# Altium PCB PCB2.PcbDoc (part 1 of 2)
Units mil, origin at the board's own origin, x right, y up, seen from the top; angles counter-clockwise.
Board outline 2244.09 x 1732.28 mil, 4 copper layers (Top Layer, GND, PWR, Bottom Layer), stack 61.58 mil thick; 44 components, 99 nets, 307 pads, 123 vias.
Unrouted connection lines stored in the file: 48.
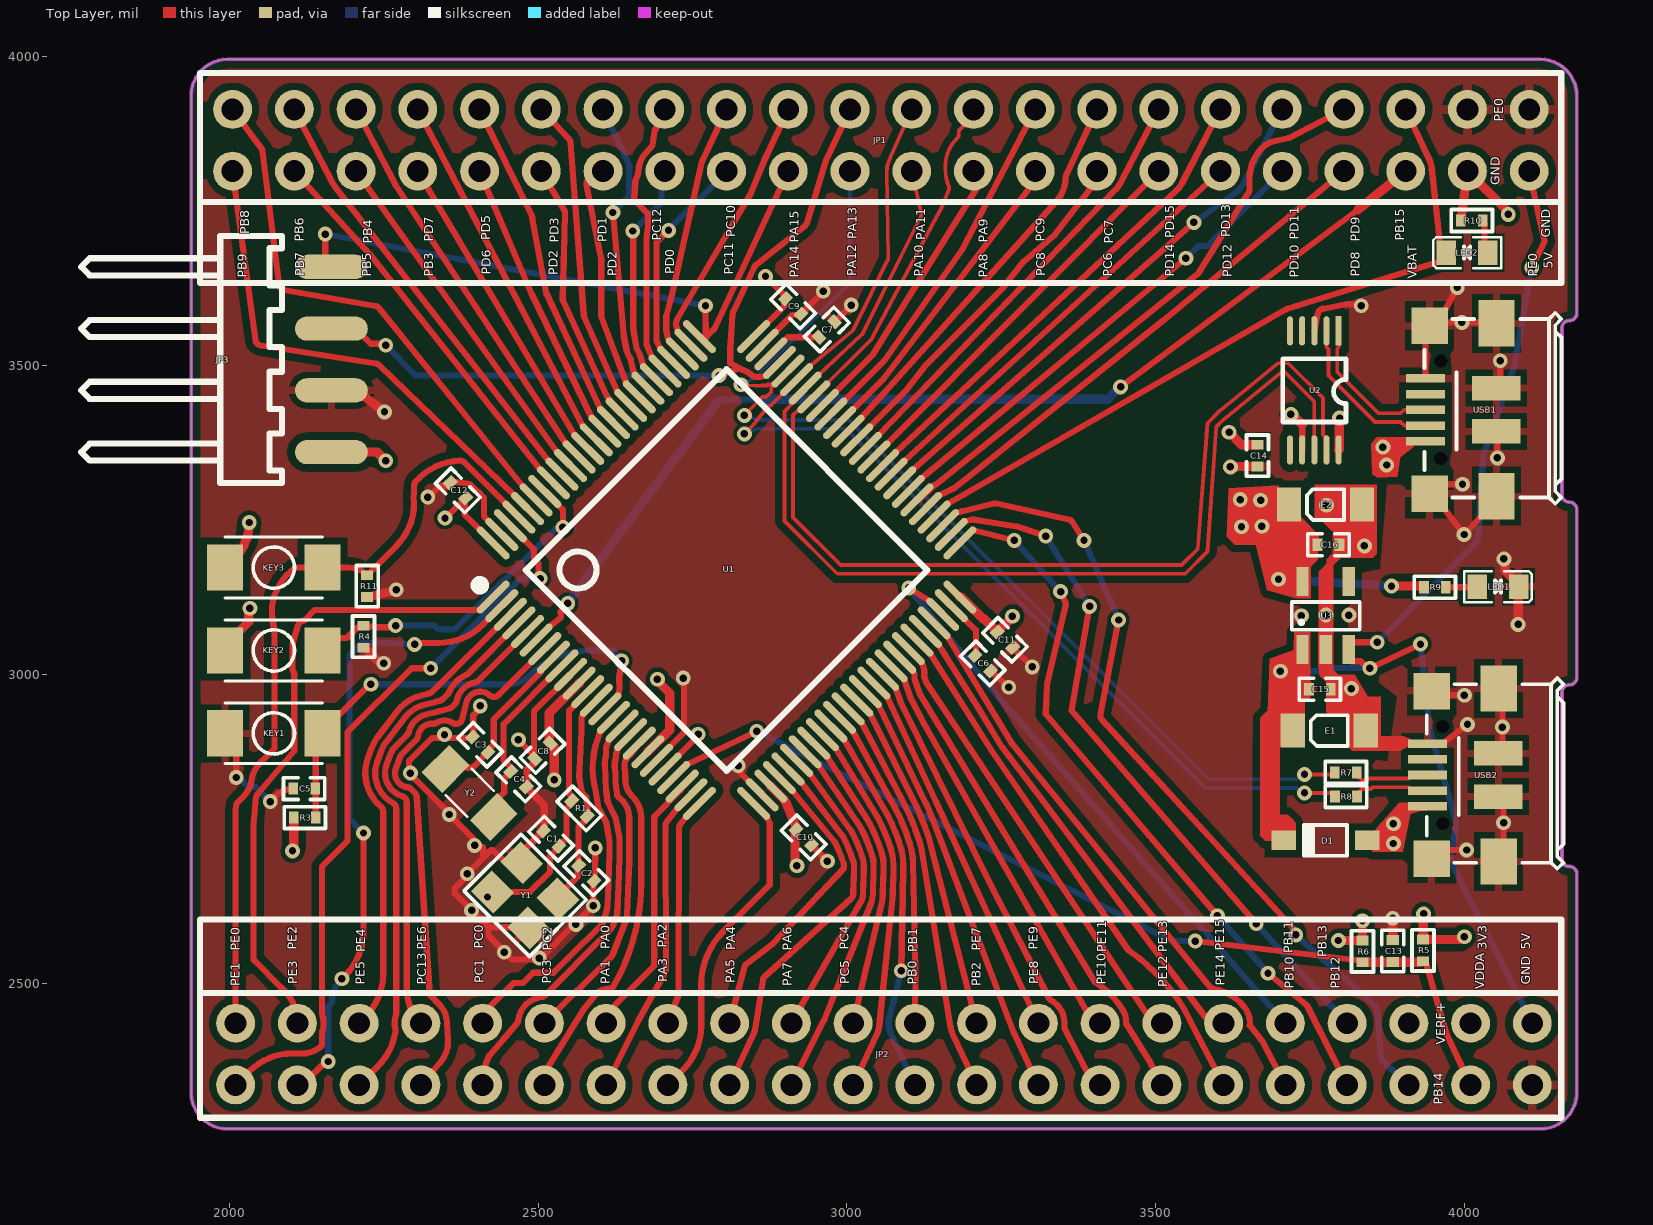
[diagram p0: Top Layer view]
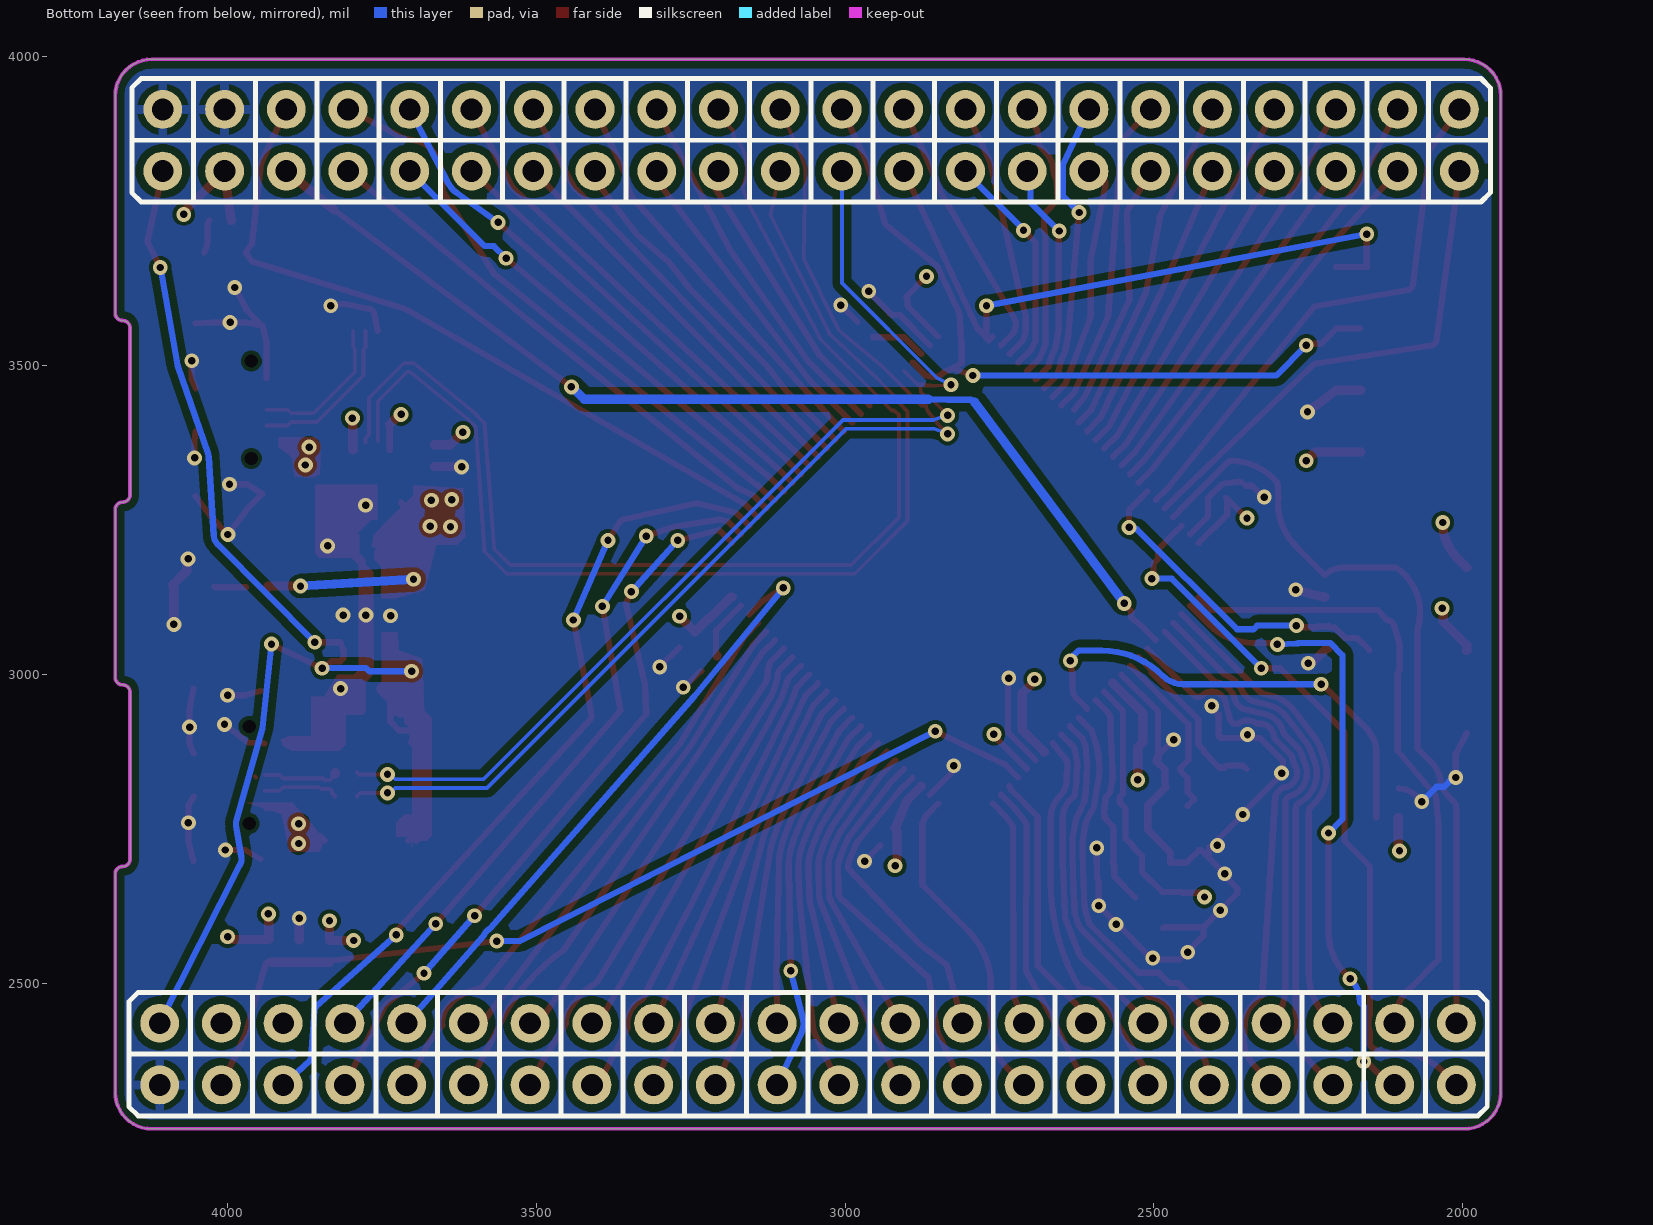
[diagram p1: Bottom Layer view, seen from below]
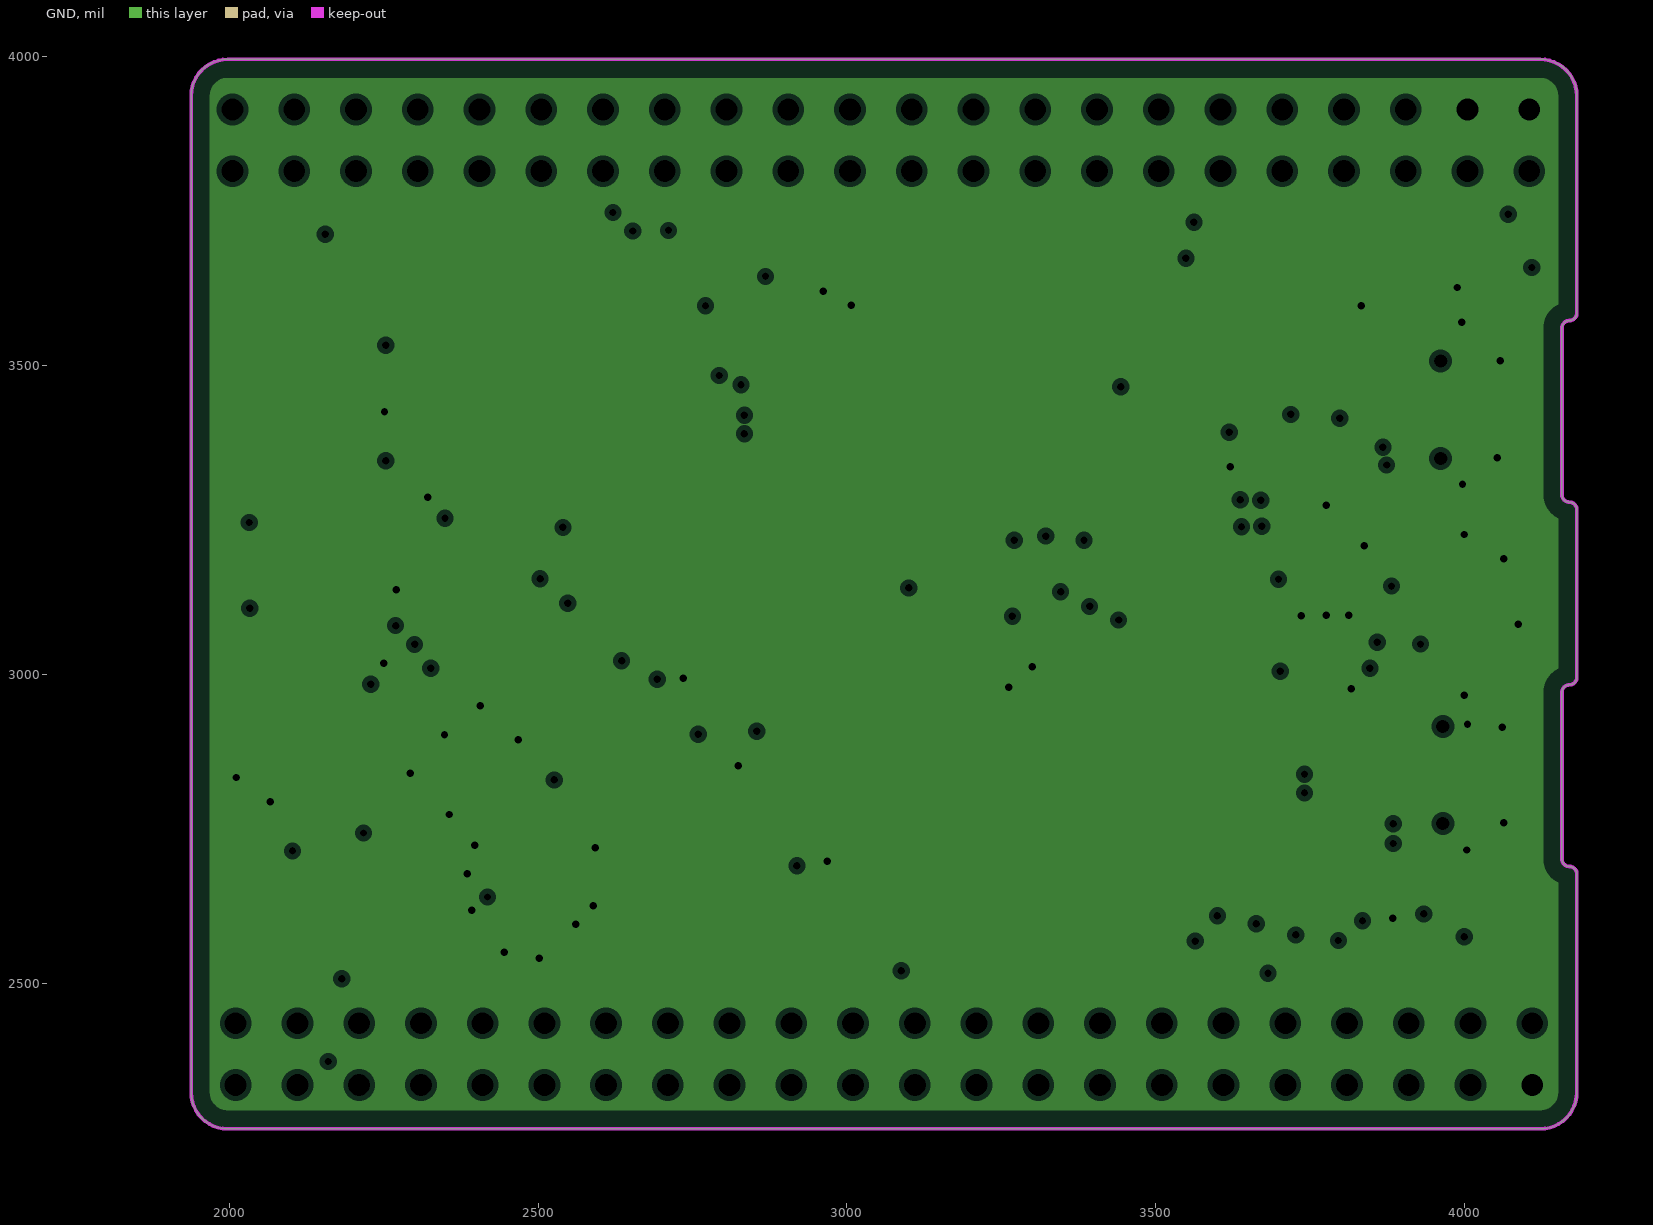
[diagram p2: GND, clearances drawn from the general rule]
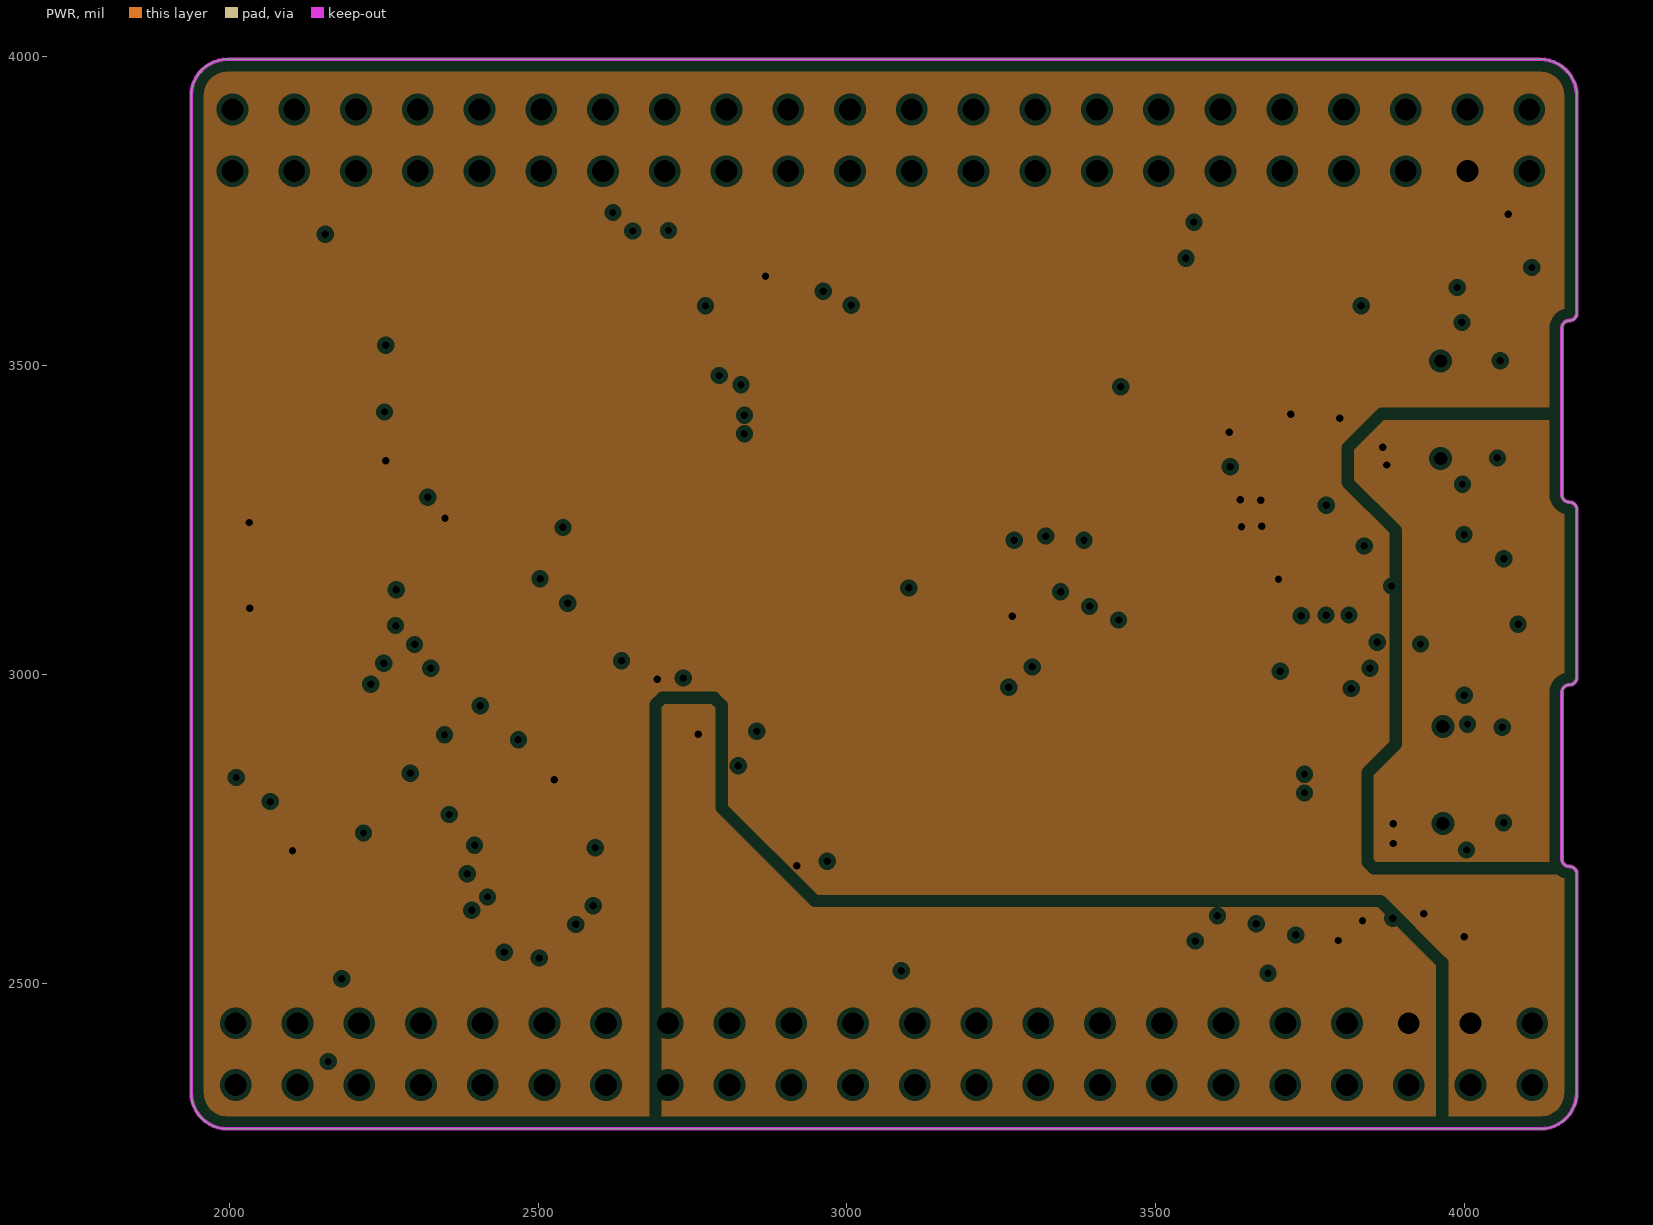
[diagram p3: PWR, clearances drawn from the general rule]

## Layer stack, top to bottom
Top Solder: solder mask 0.4, Solder Resist, Dk 3.5
Top Layer: signal copper 1.38
Dielectric 2: prepreg 3.91, PP-015, Dk 4.3
GND: plane copper 0.6, net GND
Dielectric 1: dielectric 49.8, FR-4, Dk 4.8
PWR: plane copper 0.6, net (Multiple Nets)
Dielectric 3: prepreg 3.91, PP-015, Dk 4.3
Bottom Layer: signal copper 1.38
Bottom Solder: solder mask 0.4, Solder Resist, Dk 3.5

## Board outline
1997.01,2263.86 cw(c1997.01,2322.91) 1937.95,2322.91 1937.95,3937.09 cw(c1997.01,3937.09) 1997.01,3996.14 4122.99,3996.14 cw(c4122.99,3937.09) 4182.05,3937.09 4182.05,3585 cw(c4170.05,3585) 4170.05,3573 ccw(c4170.05,3561) 4158.05,3561 4158.05,3290.84 ccw(c4170.05,3290.84) 4170.05,3278.84 cw(c4170.05,3266.84) 4182.05,3266.84 4182.05,2995 cw(c4170.05,2995) 4170.05,2983 ccw(c4170.05,2971) 4158.05,2971 4158.05,2700.84 ccw(c4170.05,2700.84) 4170.05,2688.84 cw(c4170.05,2676.84) 4182.05,2676.84 4182.05,2322.91 cw(c4122.99,2322.91) 4122.99,2263.86

## Design rules (kind name [scope] priority, off if disabled: settings)
Clearance [All] p1: gap=6 ignorepadtopadclearanceinfootprint=FALSE except(12: Arc-Fill Arc-Poly Arc-Region Track-Fill Track-Poly Track-Region SMDPad-Fill SMDPad-Poly SMDPad-Region THPad-Fill THPad-Poly THPad-Region Fill-Fill Fill-Poly Fill-Region Poly-Poly Poly-Region Region-Region)
DiffPairsRouting DiffPair_DiffPairsRouting [InDifferentialPair ('NewDifferentialPair1')] p1: maxlimit=8 minlimit=8 mostfreqgap=8 toplayer_minwidth=6.08 toplayer_maxwidth=6.08 toplayer_prefwidth=6.08 bottomlayer_minwidth=6.08 bottomlayer_maxwidth=6.08 bottomlayer_prefwidth=6.08 maxuncoupledlength=500
DiffPairsRouting DiffPair_DiffPairsRouting [InDifferentialPair ('NewDifferentialPair2')] p2: maxlimit=8 minlimit=8 mostfreqgap=8 toplayer_minwidth=6.08 toplayer_maxwidth=6.08 toplayer_prefwidth=6.08 bottomlayer_minwidth=6.08 bottomlayer_maxwidth=6.08 bottomlayer_prefwidth=6.08 maxuncoupledlength=500
DiffPairsRouting DiffPair_DiffPairsRouting [InDifferentialPair ('D_2D')] p3: maxlimit=8 minlimit=8 mostfreqgap=8 toplayer_minwidth=6.08 toplayer_maxwidth=6.08 toplayer_prefwidth=6.08 bottomlayer_minwidth=6.08 bottomlayer_maxwidth=6.08 bottomlayer_prefwidth=6.08 maxuncoupledlength=500
DiffPairsRouting DiffPair_DiffPairsRouting [InDifferentialPair ('D_2D')] p4: maxlimit=8 minlimit=8 mostfreqgap=8 toplayer_minwidth=6.08 toplayer_maxwidth=6.08 toplayer_prefwidth=6.08 bottomlayer_minwidth=6.08 bottomlayer_maxwidth=6.08 bottomlayer_prefwidth=6.08 maxuncoupledlength=500
DiffPairsRouting DiffPairsRouting_3 [InDifferentialPair ('D_2D')] p5: maxlimit=10 minlimit=10 mostfreqgap=10 toplayer_minwidth=15 toplayer_maxwidth=15 toplayer_prefwidth=15 bottomlayer_minwidth=15 bottomlayer_maxwidth=15 bottomlayer_prefwidth=15 maxuncoupledlength=500
DiffPairsRouting DiffPair_DiffPairsRouting [InDifferentialPair ('D_1D')] p6: maxlimit=8 minlimit=8 mostfreqgap=8 toplayer_minwidth=6.08 toplayer_maxwidth=6.08 toplayer_prefwidth=6.08 bottomlayer_minwidth=6.08 bottomlayer_maxwidth=6.08 bottomlayer_prefwidth=6.08 maxuncoupledlength=500
DiffPairsRouting DiffPairsRouting_2 [InDifferentialPair ('D_1D')] p7: maxlimit=10 minlimit=10 mostfreqgap=10 toplayer_minwidth=15 toplayer_maxwidth=15 toplayer_prefwidth=15 bottomlayer_minwidth=15 bottomlayer_maxwidth=15 bottomlayer_prefwidth=15 maxuncoupledlength=500
DiffPairsRouting DiffPairsRouting_1 [InDifferentialPair ('NewDifferentialPair1')] p8: maxlimit=10 minlimit=10 mostfreqgap=10 toplayer_minwidth=15 toplayer_maxwidth=15 toplayer_prefwidth=15 bottomlayer_minwidth=15 bottomlayer_maxwidth=15 bottomlayer_prefwidth=15 maxuncoupledlength=500
DiffPairsRouting [All] p9: maxlimit=8 minlimit=8 mostfreqgap=8 toplayer_minwidth=6.08 toplayer_maxwidth=6.08 toplayer_prefwidth=6.08 bottomlayer_minwidth=6.08 bottomlayer_maxwidth=6.08 bottomlayer_prefwidth=6.08 maxuncoupledlength=500
MatchedLengths DiffPair_MatchedLengths [InDifferentialPair ('NewDifferentialPair1')] p1: tolerance=1000 checknetsindiffpair=FALSE checkdiffpairvsdiffpair=TRUE checkxsignals=TRUE checkothers=TRUE
MatchedLengths DiffPair_MatchedLengths [InDifferentialPair ('NewDifferentialPair2')] p2: tolerance=1000 checknetsindiffpair=FALSE checkdiffpairvsdiffpair=TRUE checkxsignals=TRUE checkothers=TRUE
MatchedLengths DiffPair_MatchedLengths [InDifferentialPair ('D_2D')] p3: tolerance=1000 checknetsindiffpair=FALSE checkdiffpairvsdiffpair=TRUE checkxsignals=TRUE checkothers=TRUE
MatchedLengths DiffPair_MatchedLengths [InDifferentialPair ('D_2D')] p4: tolerance=1000 checknetsindiffpair=FALSE checkdiffpairvsdiffpair=TRUE checkxsignals=TRUE checkothers=TRUE
MatchedLengths MatchedLengths_2 [InDifferentialPair ('D_2D')] p5: tolerance=1000 checknetsindiffpair=FALSE checkdiffpairvsdiffpair=TRUE checkxsignals=TRUE checkothers=TRUE
MatchedLengths DiffPair_MatchedLengths [InDifferentialPair ('D_1D')] p6: tolerance=1000 checknetsindiffpair=FALSE checkdiffpairvsdiffpair=TRUE checkxsignals=TRUE checkothers=TRUE
MatchedLengths MatchedLengths_1 [InDifferentialPair ('D_1D')] p7: tolerance=1000 checknetsindiffpair=FALSE checkdiffpairvsdiffpair=TRUE checkxsignals=TRUE checkothers=TRUE
MatchedLengths [InDifferentialPair ('NewDifferentialPair1')] p8: tolerance=1000 checknetsindiffpair=FALSE checkdiffpairvsdiffpair=TRUE checkxsignals=TRUE checkothers=TRUE
MinimumSolderMaskSliver [All] p1: minsoldermaskwidth=4
PlaneClearance [All] p1: clearance=8
PlaneConnect [All] p1: pad.planeconnectstyle=Relief pad.reliefexpansion=12 pad.reliefentries=4 pad.reliefconductorwidth=12 pad.reliefairgap=10 via.planeconnectstyle=Direct via.reliefexpansion=20 via.reliefentries=4 via.reliefconductorwidth=10 via.reliefairgap=10
PolygonConnect [All] p1: thpad.connectstyle=Relief thpad.reliefconductorwidth=15 thpad.reliefentries=4 thpad.polygonreliefangle="90 Angle" thpad.airgapwidth=10 smdpad.connectstyle=Relief smdpad.reliefconductorwidth=12 smdpad.reliefentries=4 smdpad.polygonreliefangle="90 Angle" smdpad.airgapwidth=10 via.connectstyle=Direct via.reliefconductorwidth=10 via.reliefentries=4 via.polygonreliefangle="90 Angle" via.airgapwidth=10
RoutingVias [All] p1: holewidth=12 width=24 viastyle="Through Hole" minholewidth=12 minwidth=24 maxholewidth=12 maxwidth=24
SilkToSilkClearance [All] p1: silktosilkclearance=0
SilkToSolderMaskClearance [IsPad] p1: minsilkscreentomaskgap=0 clearancetoexposedcopper=TRUE
SolderMaskExpansion [All] p1: expansion=1 istentingtop=FALSE
SupplyNets "Schematic Supply Nets_4" [InNet('VCC')] p1: voltage=0.000
SupplyNets "Schematic Supply Nets_3" [InNet('3V3')] p2: voltage=0.000
SupplyNets "Schematic Supply Nets_2" [InNet('GND')] p3: voltage=0.000
SupplyNets "Schematic Supply Nets_1" [InNet('5V')] p4: voltage=0.000
UnRoutedNet [All] p1: checkbadconnections=TRUE
Width Width_1 [InNetClass('New Class')] p1: maxlimit=15 minlimit=10 preferedwidth=15
Width [All] p2: maxlimit=10 minlimit=10 preferedwidth=10
23 further rules are at their usual default settings.

## Classes and differential pairs
net class "New Class": 3V3 5V GND VBAT VCAP_1 VCAP_2 VCC VDDA VREF+
component class U_03-key+led+swd: aa C5 JP3 KEY1 KEY2 KEY3 LED1 LED2 R3 R4 R9 R10 R11
component class U_02-cpu+connect: C1 C2 C3 C4 C6 C7 C8 C9 C10 C11 C12 C13 JP1 JP2 R1 R5 R6 Y1 Y2
component class U_01-PWR: C14 C15 C16 D1 E1 E2 R7 R8 U2 U3 USB1 USB2
differential pair NewDifferentialPair2: +PA12 -PA11
differential pair NewDifferentialPair1: +PA9 -PA10
differential pair D_2D: +2D_+ -2D_-
differential pair D_1D: +1D_+ -1D_-

## Components (designator, comment, footprint, x,y, rotation, side; value= is the part's Value field where it differs from the comment)
C1 "20pF" "C 0402_L" 2521,2734 r315 top
C2 "20pF" "C 0402_L" 2578,2678 r135 top
C3 "10pF" "C 0402_L" 2406,2886 r315 top
C4 "10pF" "C 0402_L" 2468,2830 r135 top
C5 "0.1uF" "C 0402_L" 2121,2815 r0 top
C6 "2.2uF" "C 0402_L" 3220,3018 r135 top
C7 "2.2uF" "C 0402_L" 2967.47,3558.47 r225 top
C8 "0.1uF" "C 0402_L" 2507,2876 r225 top
C9 "0.1uF" "C 0402_L" 2913,3596 r315 top
C10 "0.1uF" "C 0402_L" 2930,2736 r315 top
C11 "0.1uF" "C 0402_L" 3256,3056 r315 top
C12 "0.1uF" "C 0402_L" 2370,3298 r135 top
C13 "0.1uF" "C 0402_L" 3884,2552 r270 top
C14 "0.1uF" "C 0402_L" 3665,3354.29 r90 top
C15 "0.1uF" "C 0402_L" 3766,2976 r180 top
C16 "0.1uF" "C 0402_L" 3780,3210 r180 top
D1 "1N4007" SOD-123 3775,2731 r180 top
E1 "10uF" "CD A(3216)" 3781,2909 r0 top
E2 "10uF" "CD A(3216)" 3775,3275 r0 top
JP1 "Header 2x22" HDR2.54-LI-2x22P 3055,3865 r180 top
JP2 "Header 2x22" HDR2.54-LI-2x22P 3060,2385 r180 top
JP3 "SWD" HDR2.54-WS-4P 2165,3510 r90 top
KEY1 "KEY" SWT3*4 2071.87,2904.56 r180 top
KEY2 "KEY" SWT3*4 2071.87,3038.74 r180 top
KEY3 "KEY" SWT3*4 2071.87,3172.92 r180 top
LED1 "LED" "LED 0603" 4054.46,3142 r0 top
LED2 "LED" "LED 0603" 4004.46,3683 r180 top
R1 "1M" "R 0402_L" 2566.74,2782.79 r315 top
R3 "10K" "R 0402_L" 2122,2768 r0 top
R4 "10K" "R 0402_L" 2217,3061 r90 top
R5 "0R" "R 0402_L" 3933,2553 r90 top
R6 "0R" "R 0402_L" 3835,2551.29 r90 top
R7 "0R" "R 0402_L" 3808,2841 r180 top
R8 "0R" "R 0402_L" 3808.28,2802 r180 top
R9 "4.7K" "R 0402_L" 3952.29,3141 r0 top
R10 "4.7K" "R 0402_L" 4012,3735 r0 top
R11 "10K" "R 0402_L" 2223,3143 r90 top
U1 "STM32F407VET6" "LQFP100 14x14_N" 2805,3169 r315 top
U2 "CH340E" MSOP10_L 3757,3460 r180 top
U3 "RT9013-33" SOT23-5N 3775.4,3095.12 r0 top
USB1 "USB" USB-MICRO_E 4052,3428.5 r90 top
USB2 "USB" USB-MICRO_E 4055.4,2837 r90 top
Y1 "8M" "OSC 3225-4P" 2479,2642 r315 top
Y2 "32.768KHz" FC135-3.2X1.5 2389,2808 r315 top

## Footprints (in the part's own frame and the unit in brackets; to place one, negate y for a bottom-side part, rotate by r counter-clockwise, add the part's x,y. Pads: shape width x height; smd on the part's side, far side on the other; paste and mask are expansions set on the pad)
"C 0402_L" [mm] "无极性贴片电容"
  rect 0.4x0.5 smd: 1(-0.45,0) 2(0.45,0)
  silkscreen extent -0.85,-0.45 0.85,0.45, body extent -0.5,-0.26 0.5,0.26, height 0.53
"CD A(3216)" [mm] "长3.2mm，宽1.6mm，厚1.6mm"
  rect 1x1.4 smd: 1(-1.5,0) 2(1.5,0)
  silkscreen extent -0.76,-0.64 0.76,0.64, body extent -1.6,-0.8 1.6,0.8, height 1.6
FC135-3.2X1.5 [mm] "晶振"
  rect 1.2x1.6 smd: 1(-1.4,0) 2(1.4,0)
  silkscreen extent -0.64,-0.76 0.64,0.76, body extent -1.61,-0.76 1.61,0.76, height 0.91
HDR2.54-LI-2x22P [mm] "双排排针，20x2脚"
  round 1.6 hole 0.9: 1(-26.67,-1.27) 2(-26.67,1.27) 3(-24.13,-1.27) 4(-24.13,1.27) 5(-21.59,-1.27) 6(-21.59,1.27) 7(-19.05,-1.27) 8(-19.05,1.27) 9(-16.51,-1.27) 10(-16.51,1.27) 11(-13.97,-1.27) 12(-13.97,1.27) 13(-11.43,-1.27) 14(-11.43,1.27) 15(-8.89,-1.27) 16(-8.89,1.27) 17(-6.35,-1.27) 18(-6.35,1.27) 19(-3.81,-1.27) 20(-3.81,1.27) 21(-1.27,-1.27) 22(-1.27,1.27) 23(1.27,-1.27) 24(1.27,1.27) 25(3.81,-1.27) 26(3.81,1.27) 27(6.35,-1.27) 28(6.35,1.27) 29(8.89,-1.27) 30(8.89,1.27) 31(11.43,-1.27) 32(11.43,1.27) 33(13.97,-1.27) 34(13.97,1.27) 35(16.51,-1.27) 36(16.51,1.27) 37(19.05,-1.27) 38(19.05,1.27) 39(21.59,-1.27) 40(21.59,1.27) 41(24.13,-1.27) 42(24.13,1.27) 43(26.67,-1.27) 44(26.67,1.27)
  body extent -27.94,-2.54 27.94,2.54, height 8.5
HDR2.54-WS-4P [mm] "4P卧式贴片排针2.54"
  oval 1x3 smd: 1(-3.81,0) 2(-1.27,0) 3(1.27,0) 4(3.81,0)
  silkscreen extent -5.08,2.03 5.08,10.29, body extent -5.08,-0.76 5.08,10.34, height 2.54
"LED 0603" [mm] "贴片带丝印"
  rect 0.8x1 smd: 1(-0.85,0) 2(0.85,0)
  silkscreen extent -1.4,-0.64 1.4,0.64, body extent -0.8,-0.4 0.8,0.4, height 0.61
"LQFP100 14x14_N" [mm] "100脚，体宽14x14mm，脚距0.5mm"
  oval 0.3x1.8 smd: 1(-6,-7.575) 2(-5.5,-7.575) 3(-5,-7.575) 4(-4.5,-7.575) 5(-4,-7.575) 6(-3.5,-7.575) 7(-3,-7.575) 8(-2.5,-7.575) 9(-2,-7.575) 10(-1.5,-7.575) 11(-1,-7.575) 12(-0.5,-7.575) 13(0,-7.575) 14(0.5,-7.575) 15(1,-7.575) 16(1.5,-7.575) 17(2,-7.575) 18(2.5,-7.575) 19(3,-7.575) 20(3.5,-7.575) 21(4,-7.575) 22(4.5,-7.575) 23(5,-7.575) 24(5.5,-7.575) 25(6,-7.575) 51(6,7.575) 52(5.5,7.575) 53(5,7.575) 54(4.5,7.575) 55(4,7.575) 56(3.5,7.575) 57(3,7.575) 58(2.5,7.575) 59(2,7.575) 60(1.5,7.575) 61(1,7.575) 62(0.5,7.575) 63(0,7.575) 64(-0.5,7.575) 65(-1,7.575) 66(-1.5,7.575) 67(-2,7.575) 68(-2.5,7.575) 69(-3,7.575) 70(-3.5,7.575) 71(-4,7.575) 72(-4.5,7.575) 73(-5,7.575) 74(-5.5,7.575) 75(-6,7.575)
  oval 1.8x0.3 smd: 26(7.576,-6) 27(7.576,-5.5) 28(7.576,-5) 29(7.576,-4.5) 30(7.576,-4) 31(7.576,-3.5) 32(7.576,-3) 33(7.576,-2.5) 34(7.576,-2) 35(7.576,-1.5) 36(7.576,-1) 37(7.576,-0.5) 38(7.576,0) 39(7.576,0.5) 40(7.576,1) 41(7.576,1.5) 42(7.576,2) 43(7.576,2.5) 44(7.576,3) 45(7.576,3.5) 46(7.576,4) 47(7.576,4.5) 48(7.576,5) 49(7.576,5.5) 50(7.576,6) 76(-7.575,6) 77(-7.575,5.5) 78(-7.575,5) 79(-7.575,4.5) 80(-7.575,4) 81(-7.575,3.5) 82(-7.575,3) 83(-7.575,2.5) 84(-7.575,2) 85(-7.575,1.5) 86(-7.575,1) 87(-7.575,0.5) 88(-7.575,0) 89(-7.575,-0.5) 90(-7.575,-1) 91(-7.575,-1.5) 92(-7.575,-2) 93(-7.575,-2.5) 94(-7.575,-3) 95(-7.575,-3.5) 96(-7.575,-4) 97(-7.575,-4.5) 98(-7.575,-5) 99(-7.575,-5.5) 100(-7.575,-6)
  silkscreen extent -6.92,-7.81 5.84,5.84, body extent -8,-8 8,8, height 1.45
MSOP10_L [mm] "塑封体长3mm，宽3mm，脚距0.5"
  rect 0.25x1.2 smd: 1(-1,-2.45)
  oval 0.25x1.2 smd: 2(-0.5,-2.45) 3(0,-2.45) 4(0.5,-2.45) 5(1,-2.45) 6(1,2.45) 7(0.5,2.45) 8(0,2.45) 9(-0.5,2.45) 10(-1,2.45)
  silkscreen extent -1.3,-1.3 1.3,1.3, body extent -1.5,-2.45 1.5,2.45, height 0.95
"OSC 3225-4P" [mm] "3.2*2.5*0.7mm(长宽高)"
  rect 1.3x1.2 smd: 1(-1.05,-0.85) 2(1.05,-0.85) 3(1.05,0.85) 4(-1.05,0.85)
  silkscreen extent -1.9,-1.65 1.9,1.65, body extent -1.6,-1.25 1.6,1.25, height 0.7
"R 0402_L" [mm] "1/16W贴片电阻"
  rect 0.4x0.5 smd: 1(-0.45,0) 2(0.45,0)
  silkscreen extent -0.85,-0.45 0.85,0.45, body extent -0.5,-0.25 0.5,0.25, height 0.3
SOD-123 [mm] "2.7x1.6X1.1mm（长宽高，不包括引脚）"
  rect 1x0.8 smd: 1(-1.714,0) 2(1.714,0)
  silkscreen extent -0.89,-0.64 0.89,0.64, body extent -1.85,-0.8 1.85,0.8, height 1.22
SOT23-5N [mm] "3x1.6x1.1mm(长宽高)"
  rect 0.5x1.2 smd: 1(-0.95,-1.4) 2(0,-1.4) 3(0.95,-1.4) 4(0.95,1.4) 5(-0.95,1.4)
  silkscreen extent -1.4,-0.58 1.4,0.56, body extent -1.45,-1.4 1.45,1.4, height 1.2
SWT3*4 [mm]
  rect 1.48x1.9 smd: 1(-2,0) 2(2,0)
  silkscreen extent -2,-1.25 2,1.25, body extent -2.45,-1.45 2.45,1.45, height 2
USB-MICRO_E [mm] "micro型USB ，5.9*8.2*2.5mm"
  round 0 hole 0.54 unplated: 0(-2,2.294) 0(2,2.294)
  rect 0.35x1.6 smd: 1(-1.295,2.921) 2(-0.648,2.921) 3(0,2.921) 4(0.648,2.921) 5(1.295,2.921)
  rect 1.9x1.5 smd: 5(-3.556,0) 5(3.556,0)
  rect 1.5x1.5 smd: 5(-3.454,2.754) 5(3.454,2.754)
  rect 1x2 smd: 5(-0.889,0.01) 5(0.889,0.01)
  silkscreen extent -3.86,-2.67 3.99,2.96, body extent -4,-2.72 4,3.36, height 2.8

## Part data
C1 C2 C3 C4 C5 C6 C7 C8 C9 C10 C11 C12 C13 C14 C15 C16: library part Cap
D1: "整流二极管", BOM名称=整流二极管
E1 E2: library part C-CD, "贴片钽电容", BOM名称=贴片钽电容
JP1 JP2: "2x22P接插件", BOM名称=20*2P接插件
JP3: library part "Header 1*4", LatestRevisionDate=17-Jul-2002, LatestRevisionNote="Re-released for DXP Platform.", Publisher="Altium Limited"
R1 R3 R4 R5 R6 R7 R8 R9 R10 R11: library part Res
U1: BOM_Manufacturer=ST, BOM_Manufacturer Part=STM32F407VET6, BOM_Supplier=LCSC, BOM_Supplier Part=C28730, image=http://image.lceda.cn/szlcsc/C28730.jpg, spicePre=U, spiceSymbolName=STM32F407VET6, subpart_no=1, tags=STM32
Y1: library part XTAL-4P, "4脚无源晶振", BOM名称=4脚无源晶振, 负载电容=CL20pF
Y2: library part XTAL-2P, vaule=32.768KHz

## Via types
v1: diameter 24, hole 12, Top Layer to Bottom Layer, tented both sides, 64 vias
v2: diameter 24, hole 12, Top Layer to Bottom Layer, 59 vias

## Nets (pads, with @x,y where several pads share a name; then routed paths per layer and width w, separated by ;. In a path a pad name is that pad's centre, name@x,y a point inside that pad or via, vN(x,y) a via of type N, cw(c..) or ccw(c..) an arc to the next point about the centre after c; other vN are vias at no path point)
1D_+: U2.1 USB1.3 | length 240.8
  Top Layer w6.08: U2.1@3796.37,3556.46 3796.37,3529.79 3794,3527.42 3794,3489.79 3861,3422.79 3896.75,3422.79 3902.46,3428.5 USB1.3@3937,3428.5
1D_-: U2.2 USB1.2 | length 264.5
  Top Layer w6.08: U2.2@3776.68,3556.46 3776.68,3529.79 3779.92,3526.56 3779.92,3483.96 3855.17,3408.71 3896.75,3408.71 3902.46,3403 USB1.2@3937,3403
2D_+: R7.1 USB2.3 | length 130.3
  Top Layer w6.08: R7.1@3825.72,2841 3830.55,2836.17 3830.55,2832.1 3834.11,2828.54 3842.71,2828.54 3845.46,2831.29 3910.09,2831.29 3915.8,2837 USB2.3@3940.4,2837 ; USB2.3@3953.95,2833.15 USB2.3@3955.8,2835
  Top Layer w15: R7.1@3825.72,2839.03 R7.1@3825.72,2841
2D_-: R8.1 USB2.2 | length 127.4
  Top Layer w6.08: R8.1@3826,2803.97 R8.1@3826,2802 3830.83,2806.83 3830.83,2810.9 3834.4,2814.46 3848.54,2814.46 3851.29,2817.21 3910.09,2817.21 3915.8,2811.5 USB2.2@3940.4,2811.5
3V3: C8.1 C9.1 C10.1 C11.1 C12.1 C14.2 C16.2 E2.1 JP1.4 JP2.3 JP3.1 KEY2.2 KEY3.2 R3.1 R5.2 R9.1 R10.1 U1.11 U1.19 U1.28 U1.50 U1.75 U1.100 U2.7 U2.10 U3.5 | length 2022.4
  Top Layer w10: v1(2349,3253) 2349.53,3253 2382,3285.47 C12.1@2382.53,3285.47 2381.14,3284.08 2381.14,3258.8 U1.100@2427.08,3212.85 ; U1.75@2848.86,3546.92 2899.08,3597.14 2899.08,3607.14 C9.1@2900.47,3608.53 2900.24,3612.36 v1(2868.14,3644.47) ; E2.1@3719,3278.05 E2.1@3715.94,3275 3715.94,3267.13 3759.41,3223.66 3759.41,3212.88 C16.2@3762.29,3210 ; U2.7@3737.32,3363.54 3737.32,3404.68 ; U3.5@3737.6,3150.12 3742.44,3154.96 U3.5@3742.44,3169.23
  Top Layer w15: KEY2.2@1993.13,3038.74 1993.13,3047.01 2031.28,3085.15 2031.28,3105.28 v2(2033,3107) ; KEY3.2@1993.13,3172.92 2007.8,3187.59 ccw(c1949.39,3246) v2(2032,3246) ; v2(2102,2714) ccw(c2096.49,2719.51) 2104.28,2719.51 R3.1@2104.28,2768 ; JP3.1@2165,3360 2239,3360 v2(2253,3346) ; C8.1@2518.76,2889.82 2518,2890.58 2518,2937.27 2566.28,2985.55 U1.11@2566.28,2985.94 ; C8.1@2519.53,2888.53 2519.53,2888 2526,2881.53 v2(2526,2829) ; U1.19@2677.63,2874.59 2713,2909.96 2713,2969.56 2693,2989.56 v2(2693,2992) ; U1.28@2876.7,2818.91 2897.51,2797.7 cw(c2883.66,2784.11) 2901.55,2791.63 2918.86,2750.45 2916.08,2746.61 2916.08,2695.35 2919,2692.44 v2(2919,2690) ; U1.50@3182.93,3125.14 3185.18,3125.14 3220.32,3090.01 3221.99,3090.01 C11.1@3243.47,3068.53 3243.47,3069 3268,3093.53 v2(3268,3094) ; v1(3619,3392) 3639,3372 C14.2@3665,3372 ; v2(3699,3154) 3735.66,3154 U3.5@3737.6,3150.12 ; v1(3719,3421) 3721,3421 3737.32,3404.68 ; U2.10@3796.37,3363.54 3797.18,3364.36 3797.18,3414.18 v1(3798,3415) ; v2(3882,3143) 3934.2,3143 R9.1@3934.57,3141 ; R5.2@3933,2570.71 R5.2@3933.13,2570.71 ; v1(3934,2612) 3933.5,2611.5 3933.5,2571.09 R5.2@3933.13,2570.71 ; R10.1@3994.28,3735 3994.66,3737.34 JP1.4@4005,3815 4069.28,3750.72 4069.28,3746.72 v2(4071,3745) ; v1(4000,2575) 3997.56,2575 3993.28,2570.71 R5.2@3933.13,2570.71
  Bottom Layer w15: v2(3699,3154) v2(3882,3143)
  other v1: 3639,3239 3672,3240 3670,3282 3637,3283
5V: C15.2 D1.2 E1.1 JP1.2 JP2.1 U3.1 U3.3 | length 2328.2
  Top Layer w10: v1(3702,3005) 3709.35,2997.65 E1.1@3709.35,2922.25 ; D1.2@3707.5,2731 3698.5,2740 3679.86,2740 3674,2745.86 3674,2895 3688,2909 E1.1@3721.94,2909 3736.63,2923.69 3736.63,2956.38 3754.29,2974.03 3754.29,2977.97 3737.6,2994.66 U3.1@3737.6,3039.88 ; U3.3@3812.4,3039.88 3812.4,3026.1 3817.24,3021.26 3831.95,3021.26 3843.21,3010 v1(3847,3010) v2(3929,3049) ; U3.3@3812.8,3040 3817.65,3052 v2(3859,3052) ; JP1.2@4105,3815 4130,3702 v2(4109,3659)
  Bottom Layer w10: v1(3702,3005) 3770.41,3005 3775.91,3010.5 3846.5,3010.5 v1(3847,3010) ; v2(3859,3052) 4015.87,3210.35 ccw(c3999.54,3226.54) 4022.49,3225.07 4030.58,3352 cw(c4053.54,3350.54) 4031.8,3358.06 4080.27,3498.01 ccw(c4058.54,3505.54) 4081.18,3501.53 v2(4109,3659) ; v2(3929,3049) 3943.57,2913.43 ccw(c3965.07,2915.74) 3944.28,2909.8 3985.87,2764.2 cw(c3965.07,2758.26) 3986.39,2754.57 3977.87,2705.46 ccw(c4000.54,2701.54) 3980.03,2691.13 JP2.1@4110,2435
BOOT0: KEY2.1 R4.2 U1.94 | length 549.4
  Top Layer w10: KEY2.1@2150.61,3038.74 2170.77,3058.89 2189.61,3058.89 2206.56,3075.84 2214.14,3075.84 R4.2@2217,3078.71 2218.3,3077.42 2234.64,3077.42 2235.74,3076.32 2266.32,3076.32 v2(2269,3079) ; U1.94@2510.6,3296.37 2522.27,3284.69 2522.27,3284.2 2540,3266.48 v2(2540,3238)
  Bottom Layer w10: v2(2269,3079) 2332.38,3079 2338.38,3073 2365,3073 2527.32,3235.32 2537.32,3235.32 v2(2540,3238)
GND: C1.1 C2.1 C3.1 C4.1 C5.1 C6.1 C7.1 C8.2 C9.2 C10.2 C11.2 C12.2 C13.1 C14.1 C15.1 C16.1 E1.2 E2.2 JP1.1 JP1.3 JP2.2 JP3.2 KEY1.2 LED1.2 R4.1 R11.1 U1.10 U1.20 U1.27 U1.74 U1.99 U2.3 U3.2 USB1.5 USB2.5 Y1.2 Y1.4 | length 3792.1
  Top Layer w10: KEY1.2@1993.13,2904.56 2010,2872.16 2011,2872.16 v2(2011,2833) ; v2(2066,2794) 2075.49,2803.49 cw(c2103.28,2775.69) C5.1@2103.28,2815 ; v1(2293,2840) v1@2292,2839 ; v1(2321,3287) 2322.24,3287 2340.71,3305.47 C12.2@2351,3305.47 ; v1(2348.17,2902.35) v1@2348.17,2897.14 ; C12.2@2357.48,3310.53 2362.93,3311.92 2385.38,3308.9 cw(c2383.92,3298) 2390.25,3307 cw(c2383.92,3298) 2390.34,3306.93 2391.07,3306.41 2406.14,3292.09 2412,3286.23 2412,3284.68 2412,3256.26 2441,3227.26 U1.99@2441,3226.77 ; v1(2385,2677) 2410.68,2702.68 ; v1@2386.74,2675.26 2364.88,2653.4 2364.88,2645.12 v1(2392.19,2617.81) 2419.5,2590.5 ; v1(2397,2723) 2394.32,2725.68 2394.32,2734.68 v1(2356,2773) 2356,2775 v1@2292,2839 ; v1@2397.68,2723 2397.68,2720.32 2410.68,2720.32 2410.68,2702.68 ; v1(2406,2949) 2406,2945.21 2394.86,2934.08 2394.86,2899.92 C3.1@2393.47,2898.53 2392.08,2897.14 v1@2348.17,2897.14 ; 2423.25,2715.25 2410.68,2702.68 ; 2426.74,2715.25 2447.1,2694.89 Y1.4@2473.43,2694.89 Y1.4@2473.43,2711.49 ; v1(2468,2894) C8.2@2494.47,2867.53 ; Y1.2@2484.57,2589.11 2483.18,2590.5 2419.5,2590.5 ; C8.2@2493.08,2864.87 2493.08,2940.1 2552.36,2999.37 U1.10@2552.36,2999.86 ; v1(2501.55,2540.53) 2499.02,2538 2457.86,2538 2419.5,2576.36 2419.5,2590.5 ; v1@2503.04,2539.04 2503.04,2539.53 2559.51,2596 2560,2596 v1(2589.14,2625.14) 2589.14,2664.08 2591.92,2670.93 v1(2592.5,2719) ; C1.1@2508.47,2746.53 C1.1@2509.86,2747.92 ; U1.20@2691.55,2860.67 2736,2905.12 2736,2993 v1(2735,2994) ; v1(2824,2852) 2826.68,2849.32 2826.68,2841.09 U1.27@2862.78,2804.99 ; U1.74@2862.78,3533 2911.86,3582.08 2924.13,3582.08 C9.2@2925.52,3583.47 ; C9.2@2927.53,3584.53 2927.53,3585.88 2961.62,3619.97 v1(2961.62,3620.38) ; C10.2@2942.52,2723.47 2944.35,2721.23 v1(2968.29,2697.29) ; C7.1@2980,3571 v1(3007,3598) ; C6.1@3232.53,3005.47 3234.03,3005.47 3260.5,2979 v1(3262,2979) ; C11.2@3268.52,3043.47 v1(3300,3012) ; U2.3@3757,3556.46 3761.03,3578.08 cw(c3776.68,3575.16) 3761.29,3579.21 3762.75,3584.77 ; 3762.76,3584.8 cw(c3772.42,3582.22) 3770.54,3592.04 3810.36,3599.68 ; 3810.39,3599.69 cw(c3812.24,3589.86) 3813.66,3599.76 v2(3833,3597) ; USB1.5@3937,3479.5 3937.15,3481.39 3937.15,3539.96 USB1.5@3943.57,3564.48 ; USB2.5@3940.4,2888 3966.9,2889.89 v2(4005,2919) ; USB2.5@3946.98,2701.02 3971.51,2715.54 v1(4003.54,2715.54) ; USB2.5@3946.98,2972.98 3971.51,2966.26 v1(3999.97,2966.26) ; v1(3988.54,3626.54) 3968.1,3589.01 USB1.5@3943.57,3564.48 ; v1(3997,3308) 3968.1,3308 USB1.5@3943.57,3292.52 3968.1,3267.99 v1(3999.54,3226.54) 4027.47,3256.1 USB1.5@4052,3288.5 ; USB1.5@4051.6,3393.5 4053.54,3378.81 v1(4053.54,3350.54) ; USB1.5@4052,3568.5 4027.47,3570 v1(3996,3570) 3968.1,3570 USB1.5@3943.57,3564.48 ; USB2.5@4055,2802 4063.54,2787.31 v1(4063.54,2759.54) 4063.54,2729.4 USB2.5@4055.4,2697 ; USB2.5@4055,2872 4061.54,2886.69 v1(4061.54,2914.54) 4061.54,2944.6 USB2.5@4055.4,2977 ; v1(4058,3508) 4058,3478.19 USB1.5@4051.6,3463.5 USB1.5@4058.54,3478.19 ; LED1.2@4087.93,3142 LED1.2@4087.96,3142.04 ; v1@2292,2839 2291,2840 2291,2860 2328.14,2897.14 v1@2348.17,2897.14
  Top Layer w12: Y1.4@2473.43,2711.49 C1.1@2508.47,2746.53 ; C8.2@2493.08,2864.87 2495.86,2862.09 2495.86,2859.43 2481.92,2845.49 2481.92,2818.86 C4.1@2480.53,2817.47 2509.86,2788.14 C1.1@2509.86,2747.92
  Top Layer w15: JP3.2@2165,3460 2204.37,3460 v2(2251,3425) ; R4.1@2217,3043.28 2218.97,3043.28 2242.53,3019.72 2248.28,3019.72 v2(2250,3018) ; R11.1@2223,3125.28 2225.34,3125.66 v2(2270,3137) ; v1(3621,3336) 3631,3336 3631.57,3336.57 C14.1@3665,3336.57 ; C13.1@3884,2569.72 v1(3884,2605) ; v1(4064,3187) 4065.72,3185.28 4065.72,3168.14 4087.96,3145.9 LED1.2@4087.96,3142.04 ; v1(4087,3081) 4087.46,3081.46 LED1.2@4087.46,3141.54 ; LED1.2@4087.93,3142 LED1.2@4087.93,3145.94
  Bottom Layer w10: v2(2011,2833) 2014.79,2833 2029.84,2817.95 2042.05,2817.95 v2(2066,2794) ; v1(4087,3081) v1@4088,3081
  other v1: 2445,2550 2561,2595 3817,2977 3736,3095 3776,3096 3813,3096 3838,3208 3776.5,3274.02
NetLED1_1: LED1.1 R9.2 | length 51.4
  Top Layer w10: R9.2@3970,3141 4020,3141 LED1.1@4021,3142
NetLED2_1: LED2.1 R10.2 | length 53.7
  Top Layer w10: R10.2@4029.71,3735 4032.59,3730.15 4032.59,3697.69 LED2.1@4037.93,3683
NRST: C5.2 KEY1.1 R3.2 U1.14 | length 771.4
  Top Layer w10: C5.2@2138.71,2815 cw(c2136.3,2812.58) C5.2@2139.71,2812.58 ; R3.2@2139.71,2768 C5.2@2139.71,2812.58 ; v2(2229,2984) ccw(c2229,2979.17) 2225.59,2982.59 2152.77,2909.77 ccw(c2157.98,2904.56) KEY1.1@2150.61,2904.56 ccw(c2176.93,2878.25) 2139.71,2878.25 C5.2@2139.71,2812.58 ; U1.14@2608.03,2944.19 2626.46,2962.62 ccw(c2615.43,2973.66) 2631.04,2973.66 ccw(c2614.99,2978.98) 2631.86,2980.15 2631.2,2989.99 2631.2,2994.46 v2(2635,3022)
  Bottom Layer w10: v2(2229,2984) 2452.2,2984 ccw(c2452.2,3031.8) 2485.99,2997.99 cw(c2583.96,2900.04) 2583.96,3038.58 ; 2584,3038.58 2622.14,3038.58 2635,3025.72 v2(2635,3022)
PA0: JP2.31 U1.23 | length 434.6
  Top Layer w10: JP2.31@2610,2435 2610,2449.34 2625.38,2464.72 2625.38,2465.38 2688,2528 2688,2769.67 2730.42,2812.09 ccw(c2723.31,2819.12) U1.23@2733.31,2818.91
PA1: JP2.32 U1.24 | length 509.2
  Top Layer w10: JP2.32@2610,2335 2661.91,2438.82 cw(c2670.85,2434.34) 2662.1,2439.19 2705.73,2517.72 ccw(c2696.99,2522.57) 2706.99,2522.57 ; 2706.99,2522.61 2706.01,2754.54 cw(c2716.01,2754.58) 2708.13,2760.73 2726.35,2784.11 U1.24@2747.23,2804.99
PA2: JP2.29 U1.25 | length 371.7
  Top Layer w10: JP2.29@2710,2435 2726.36,2478.31 ccw(c2717.01,2481.84) 2727.01,2481.77 ; 2727.01,2481.81 2727.99,2750.69 cw(c2737.99,2750.62) 2730.02,2756.66 2740.27,2770.19 U1.25@2761.15,2791.07
PA3: JP2.30 U1.26 | length 524.6
  Top Layer w10: JP2.30@2710,2335 2734.71,2359.71 ccw(c2664,2430.42) 2764,2430.42 2764,2497.04 ; 2764,2497.09 cw(c2886.91,2497.09) 2800,2584 2875,2659 2875,2758.72 2869.74,2770.19 U1.26@2848.86,2791.07
PA4: JP2.27 U1.29 | length 503.7
  Top Layer w10: JP2.27@2810,2435 2834.23,2526.02 2834.92,2528.62 2837.3,2531 2878.58,2562.39 2879.12,2562.8 2879.71,2563.39 2995.28,2686.17 2995.28,2690.13 2995.28,2691.65 ; U1.29@2890.62,2832.83 2911.5,2811.95 2979.54,2729.42 cw(c2971.82,2723.06) 2980.72,2727.63 ; 2980.73,2727.61 cw(c2782.97,2626.66) 2994.82,2693.13
PA5: JP2.28 U1.30 | length 621.2
  Top Layer w10: JP2.28@2810,2335 2848.47,2416.94 ccw(c2810,2435) 2852,2428.49 2863.83,2504.93 cw(c2873.72,2503.4) 2867.01,2510.82 3006.83,2637.13 ccw(c3000.12,2644.55) 3010.12,2644.24 ; U1.30@2904.54,2846.75 2925.42,2825.87 2992.93,2738.39 ; 2992.96,2738.35 cw(c2985.01,2732.28) 2993.78,2737.08 2994.62,2735.56 cw(c2971.82,2723.06) 2994.91,2735 cw(c2980.72,2727.63) 2994.94,2734.95 ; 2994.96,2734.92 cw(c2971.82,2723.06) 2994.98,2734.87 cw(c2782.97,2626.66) 3010.1,2697.87 3010.56,2696.38 cw(c2995.28,2691.65) 3011.28,2691.65 3011.28,2686.17 cw(c2995.28,2686.17) 3011.27,2685.72 3010.12,2644.28
PA6: JP2.25 U1.31 | length 490.8
  Top Layer w10: JP2.25@2910,2435 3022.68,2631.63 ccw(c3000.12,2644.55) 3026.11,2643.76 ccw(c3010.12,2644.28) 3026.11,2643.83 3027.26,2685.24 ccw(c2995.28,2686.17) 3027.28,2686.17 3027.28,2691.65 ccw(c2995.28,2691.65) 3025.84,2701.14 3025.4,2702.54 ccw(c3010.1,2697.87) 3025.38,2702.61 ; U1.31@2918.46,2860.67 2939.34,2839.79 3006.08,2747.51 cw(c2985.01,2732.28) 3007.83,2744.74 3008.62,2743.3 cw(c2971.82,2723.06) 3009.12,2742.37 ; 3009.17,2742.27 ccw(c2994.94,2734.95) 3009.14,2742.33 ; 3009.22,2742.18 cw(c2980.72,2727.63) 3009.24,2742.12 cw(c2782.97,2626.66) 3025.35,2702.7
PA7: JP2.26 U1.32 | length 601.2
  Top Layer w10: JP2.26@2910,2335 2962.81,2439.62 ccw(c2953.88,2444.13) 2963.15,2440.36 ; U1.32@2932.38,2874.59 2953.26,2853.71 3019.75,2755.89 cw(c2985.01,2732.28) 3021.89,2752.39 3022.61,2751.06 cw(c2971.82,2723.06) 3023.33,2749.73 ; 2963.16,2440.39 3039.08,2628.86 ccw(c3000.12,2644.55) 3042.1,2643.25 ccw(c3010.12,2644.28) 3042.11,2643.42 3043.26,2684.77 ccw(c2995.28,2686.17) 3043.28,2686.17 3043.28,2691.65 ccw(c2995.28,2691.65) 3041.11,2705.92 3040.68,2707.28 ccw(c3025.38,2702.61) 3040.67,2707.34 ; 3023.36,2749.67 cw(c3009.17,2742.27) 3023.39,2749.61 ; 3023.41,2749.57 cw(c2994.94,2734.95) 3023.43,2749.53 ; 3023.51,2749.37 cw(c2782.97,2626.66) 3040.61,2707.53 ; 3040.64,2707.42 ccw(c3010.1,2697.87) 3040.63,2707.47 ; 3023.45,2749.48 ccw(c2994.94,2734.95) 3023.43,2749.52
PA8: JP1.20 U1.67 | length 462.2
  Top Layer w10: U1.67@2960.22,3435.56 3041.97,3517.32 3210.5,3787.2 3210.5,3791.21 JP1.20@3205,3815
PA9: JP1.19 U1.68 U2.9 | length 1987.7
  Top Layer w6.08: JP1.19@3205,3915 3206.68,3909.44 3206.68,3906.02 3181.6,3880.94 3181.3,3877.72 3180.63,3870.54 3179.02,3868.93 ccw(c3221.58,3823.85) 3161,3837 ccw(c3238.17,3820.25) 3165.23,3790 cw(c3159.61,3787.68) 3165.37,3785.73 cw(c2898.93,3877.4) 3163.54,3780.59 cw(c2898.93,3877.4) 3147.34,3744.41 3039.37,3542.55 U1.68@2946.3,3449.48 2924.32,3427.51 2920.36,3427.51 2912.81,3419.96 2912.81,3254.19 2990,3177 3542,3177 3568.22,3203.22 3583.88,3406.55 3604.45,3427.12 3698.21,3504 3714.91,3504 3771,3447.91 3771,3388.1 3776.69,3382.42 U2.9@3776.69,3375.23
PA10: JP1.22 U1.69 U2.8 | length 1858.1
  Top Layer w6.08: JP1.22@3105,3815 3120.52,3746.11 cw(c3114.59,3744.77) 3120.04,3742.06 3025.49,3551.99 cw(c3020.05,3554.7) 3024.19,3550.25 2953.26,3484.28 U1.69@2932.38,3463.4 2910.4,3441.43 2910.4,3437.46 2898.73,3425.79 2898.73,3248.36 2984.17,3162.92 3547.83,3162.92 3584.08,3199.17 3597.96,3400.72 3610.28,3413.04 3704.04,3489.92 3709.08,3489.92 3756.92,3442.08 U2.8@3756.92,3377.75
PA11: JP1.21 R8.2 U1.70 | length 1831.6
  Top Layer w6.08: v2(2834,3389.45) 2848.97,3404.73 ccw(c2833.94,3419.45) 2849.89,3405.73 ccw(c2833.94,3419.45) 2850.6,3406.6 2865.28,3425.62 ccw(c2850.8,3436.8) 2868.99,3434.85 2869,3434.92 2876.06,3434.92 U1.70@2918.46,3477.32 2939.34,3498.2 3008.01,3555.18 ccw(c3004.12,3559.86) 3009.53,3557.06 3025.69,3588.34 ccw(c3007,3598) 3025.91,3588.77 3066.42,3671.81 ccw(c3060.95,3674.47) 3067.03,3674.58 3064.47,3814.26 cw(c3105,3815) 3067.45,3830.27 3070.96,3838.9 ; 3070.97,3838.93 cw(c3076.59,3836.61) 3071.03,3839.07 JP1.21@3105,3915 ; v2(3741,2808) 3785.74,2808 3790.57,2803.17 R8.2@3790.57,2802
  Bottom Layer w6.08: v2(2834,3389.45) 2855.8,3397.58 cw(c2857.93,3391.88) 2857.79,3397.96 2857.86,3397.96 2997.71,3397.96 3579.71,2815.96 3728.48,2815.96 3736.44,2808 v2(3741,2808)
PA12: JP1.24 R7.2 U1.71 | length 1786.2
  Top Layer w6.08: v1@2828.56,3469.06 2852.35,3467.28 ccw(c2852.81,3473.34) 2852.76,3467.26 2855.78,3467.26 ccw(c2855.82,3498.2) 2861.24,3467.73 cw(c2862.29,3461.74) 2862.29,3467.82 2870.63,3467.82 2872.18,3469.38 U1.71@2882.68,3469.38 ; v1(2833.94,3419.45) 2850.8,3436.8 2863,3449 2869,3449 2877.34,3457.34 2877.34,3464.04 U1.71@2882.68,3469.38 ; U1.71@2904.54,3491.24 2883.66,3470.36 U1.71@2882.68,3469.38 ; v2(3741,2838) 3787.28,2838 R7.2@3790.29,2841
  Bottom Layer w6.08: v1(2828.49,3469.09) 2851.53,3480.53 3005,3634 JP1.24@3005,3815 ; v1(2833.94,3419.45) 2856.06,3412.33 ccw(c2857.93,3418.12) 2857.79,3412.04 2857.86,3412.04 3003.54,3412.04 3585.54,2830.04 3728.48,2830.04 3736.44,2838 v2(3741,2838)
PA13: JP1.23 JP3.3 U1.72 | length 1261.7
  Top Layer w10: JP3.3@2165,3560 2204.37,3560 2228.9,3535.47 2250.53,3535.47 v2(2253,3533) ; v1(2793,3484) 2826.25,3495.76 ; 2814.8,3583.25 2811.11,3527.15 ccw(c2827.98,3526.04) 2811.08,3526.1 2811,3504 2826.2,3495.79 2826.25,3495.76 ; 2814.8,3583.3 cw(c2824.78,3582.6) 2815.71,3586.82 2849.71,3659.35 cw(c2858.73,3655.03) 2852.32,3662.71 cw(c2867,3645) 2852.37,3662.74 cw(c2867,3645) 2852.64,3662.97 2931.86,3726.29 ccw(c2925.62,3734.1) 2935.19,3731.2 2964.33,3827.33 cw(c3005,3815) 2966.53,3833.06 JP1.23@3005,3915 ; U1.72@2890.62,3505.16 2869.74,3484.28 2859.96,3481.81 cw(c2855.82,3498.2) 2848.72,3482.86 cw(c2855.82,3498.2) 2844.26,3485.87 ccw(c2828.56,3469.06) 2837.96,3490.05 2831.73,3492.84 cw(c2835.81,3501.96) 2831.14,3493.12 2831.06,3493.17 2826.25,3495.76
  Bottom Layer w10: v2(2253,3533) 2302,3484 v1(2793,3484)
PA14: JP1.26 JP3.4 U1.76 | length 1097.9
  Top Layer w10: v2(2155,3713) 2155,3660 JP3.4@2165,3660 JP3.4@2204.37,3660 ; U1.76@2761.15,3546.92 2767.03,3541.03 2783.76,3557.76 ccw(c2776.69,3564.83) 2785.74,3560.59 JP1.26@2905,3815 ; v2(2771,3597) U1.76@2771.44,3544.77
  Bottom Layer w10: v2(2155,3713) v2(2771,3597)
PA15: JP1.25 U1.77 | length 436.6
  Top Layer w10: U1.77@2747.23,3533 2726.35,3553.88 2723.88,3563.66 cw(c2740.27,3567.8) 2725.69,3576.35 2843.72,3777.52 ccw(c2835.09,3782.58) 2844.35,3778.8 2865.65,3831.04 cw(c2905,3815) 2866.53,3833.06 JP1.25@2905,3915
PB0: JP2.22 U1.35 | length 632.3
  Top Layer w10: U1.35@2974.14,2916.35 2995.02,2895.47 3063.04,2777.13 cw(c2985.01,2732.28) 3063.94,2775.53 3064.77,2774 cw(c2971.82,2723.06) 3065.94,2771.81 ; 3065.97,2771.76 cw(c3023.39,2749.61) 3065.99,2771.71 ; 3066.02,2771.67 cw(c3051.83,2764.27) 3066.05,2771.61 ; 3066.13,2771.44 cw(c3023.43,2749.52) 3066.2,2771.32 cw(c2782.97,2626.66) 3083.35,2731.12 cw(c2782.97,2626.66) 3086.37,2722.02 cw(c3055.86,2712.36) 3086.39,2721.96 cw(c3055.88,2712.28) 3086.4,2721.9 ; 3086.46,2721.74 cw(c3055.95,2712.08) 3086.49,2721.62 cw(c2782.97,2626.66) 3086.52,2721.53 3086.92,2720.24 ; v2(3088,2520) 3091.26,2684.26 ccw(c2995.28,2686.17) 3091.28,2686.17 3091.28,2691.65 ccw(c2995.28,2691.65) 3086.92,2720.24 ; 3088.77,2713.43 ccw(c2995.28,2691.65) 3086.92,2720.24
  Bottom Layer w10: v2(3088,2520) 3068.85,2445.59 ccw(c3110,2435) 3071.53,2416.94 JP2.22@3110,2335
PB1: JP2.21 U1.36 | length 527.1
  Top Layer w10: U1.36@2988.06,2930.27 3008.94,2909.39 3078.85,2781.62 cw(c2971.82,2723.06) 3080.15,2779.17 cw(c3023.39,2749.61) 3080.19,2779.09 ; 3080.26,2778.95 ccw(c3066.05,2771.61) 3080.23,2779.02 ; 3080.33,2778.83 cw(c3051.86,2764.21) 3080.41,2778.67 cw(c3023.43,2749.52) 3080.48,2778.53 ; 3080.48,2778.52 cw(c2782.97,2626.66) 3101.62,2726.85 ; 3101.67,2726.69 cw(c3055.88,2712.28) 3101.7,2726.6 cw(c3055.9,2712.22) 3101.76,2726.42 cw(c3071.21,2716.88) 3101.77,2726.37 ; 3101.79,2726.33 cw(c2782.97,2626.66) 3101.81,2726.25 3102.27,2724.77 cw(c2995.28,2691.65) 3107.25,2694.06 3110.99,2520.5 cw(c3088,2520) 3111,2519.73 JP2.21@3110,2435
PB2: JP2.20 U1.37 | length 653.4
  Top Layer w10: U1.37@3001.98,2944.19 3022.85,2923.31 3094.12,2786.99 cw(c2971.82,2723.06) 3094.36,2786.53 ; 3094.36,2786.52 cw(c3023.39,2749.61) 3094.39,2786.47 ; 3094.44,2786.36 cw(c3080.26,2778.95) 3094.48,2786.3 ; 3094.54,2786.17 cw(c3066.08,2771.54) 3094.62,2786.01 cw(c3023.43,2749.52) 3094.71,2785.84 ; 3094.75,2785.76 cw(c2782.97,2626.66) 3116.87,2731.68 ; 3116.94,2731.49 cw(c3055.88,2712.28) 3116.97,2731.37 cw(c3055.9,2712.22) 3117.01,2731.25 cw(c3071.21,2716.88) 3117.04,2731.14 ; 3117.07,2731.07 cw(c2782.97,2626.66) 3117.1,2730.97 3117.54,2729.54 cw(c2995.28,2691.65) 3121.6,2712.3 3168.06,2428.14 ccw(c3210,2435) 3171.53,2416.94 JP2.20@3210,2335
PB3: JP1.38 U1.89 | length 527.5
  Top Layer w10: JP1.38@2305,3815 2559.32,3386.85 U1.89@2580.19,3365.97
PB4: JP1.39 U1.90 | length 670.2
  Top Layer w10: JP1.39@2205,3915 2267.31,3795.37 ccw(c2305,3815) 2269.51,3791.62 2545.4,3372.93 U1.90@2566.28,3352.05
PB5: JP1.40 U1.91 | length 590.3
  Top Layer w10: JP1.40@2205,3815 2531.48,3359.01 U1.91@2552.36,3338.13
PB6: JP1.41 U1.92 | length 734.9
  Top Layer w10: JP1.41@2105,3915 2167.31,3795.37 ccw(c2205,3815) 2171.49,3788.87 2517.56,3345.09 U1.92@2538.44,3324.21
PB7: JP1.42 U1.93 | length 656.7
  Top Layer w10: JP1.42@2105,3815 2227.08,3680.63 cw(c2204.37,3660) 2228.44,3679.04 2503.64,3331.17 U1.93@2524.52,3310.29
PB8: JP1.43 U1.95 | length 872.9
  Top Layer w10: JP1.43@2005,3915 2051.44,3852.11 cw(c2043.4,3846.17) 2053.32,3847.44 ; 2053.32,3847.4 2080.09,3631.34 ccw(c2090.02,3632.57) 2088.24,3622.73 ; 2088.28,3622.72 2236.3,3596.65 cw(c2234.57,3586.8) 2242.33,3593.11 2475.8,3303.33 U1.95@2496.68,3282.45
PB9: JP1.44 U1.96 | length 818.2
  Top Layer w10: JP1.44@2005,3815 2042.01,3541.34 ccw(c2051.91,3542.72) 2050.31,3532.85 ; 2050.36,3532.84 2236.89,3503.49 cw(c2235.33,3493.61) 2242.24,3500.84 ; 2242.27,3500.82 2461.88,3289.41 U1.96@2482.76,3268.53
PB10: JP2.10 U1.47 | length 952.2
  Top Layer w10: U1.47@3141.17,3083.38 3162.05,3062.5 3266.72,2888.44 3267.09,2887.83 3588.04,2493.89 3590.73,2491.2 3593.76,2490.74 cw(c3579.7,2410.15) 3643.13,2461.82 ; 3643.13,2461.83 cw(c3610.18,2434.98) 3652.49,2431.06 3673.68,2404.72 JP2.10@3710,2335